# EAGLE board Relay-Board_Rack-PDU_2.0 (EAGLE 9.2.1), part 1 of 2
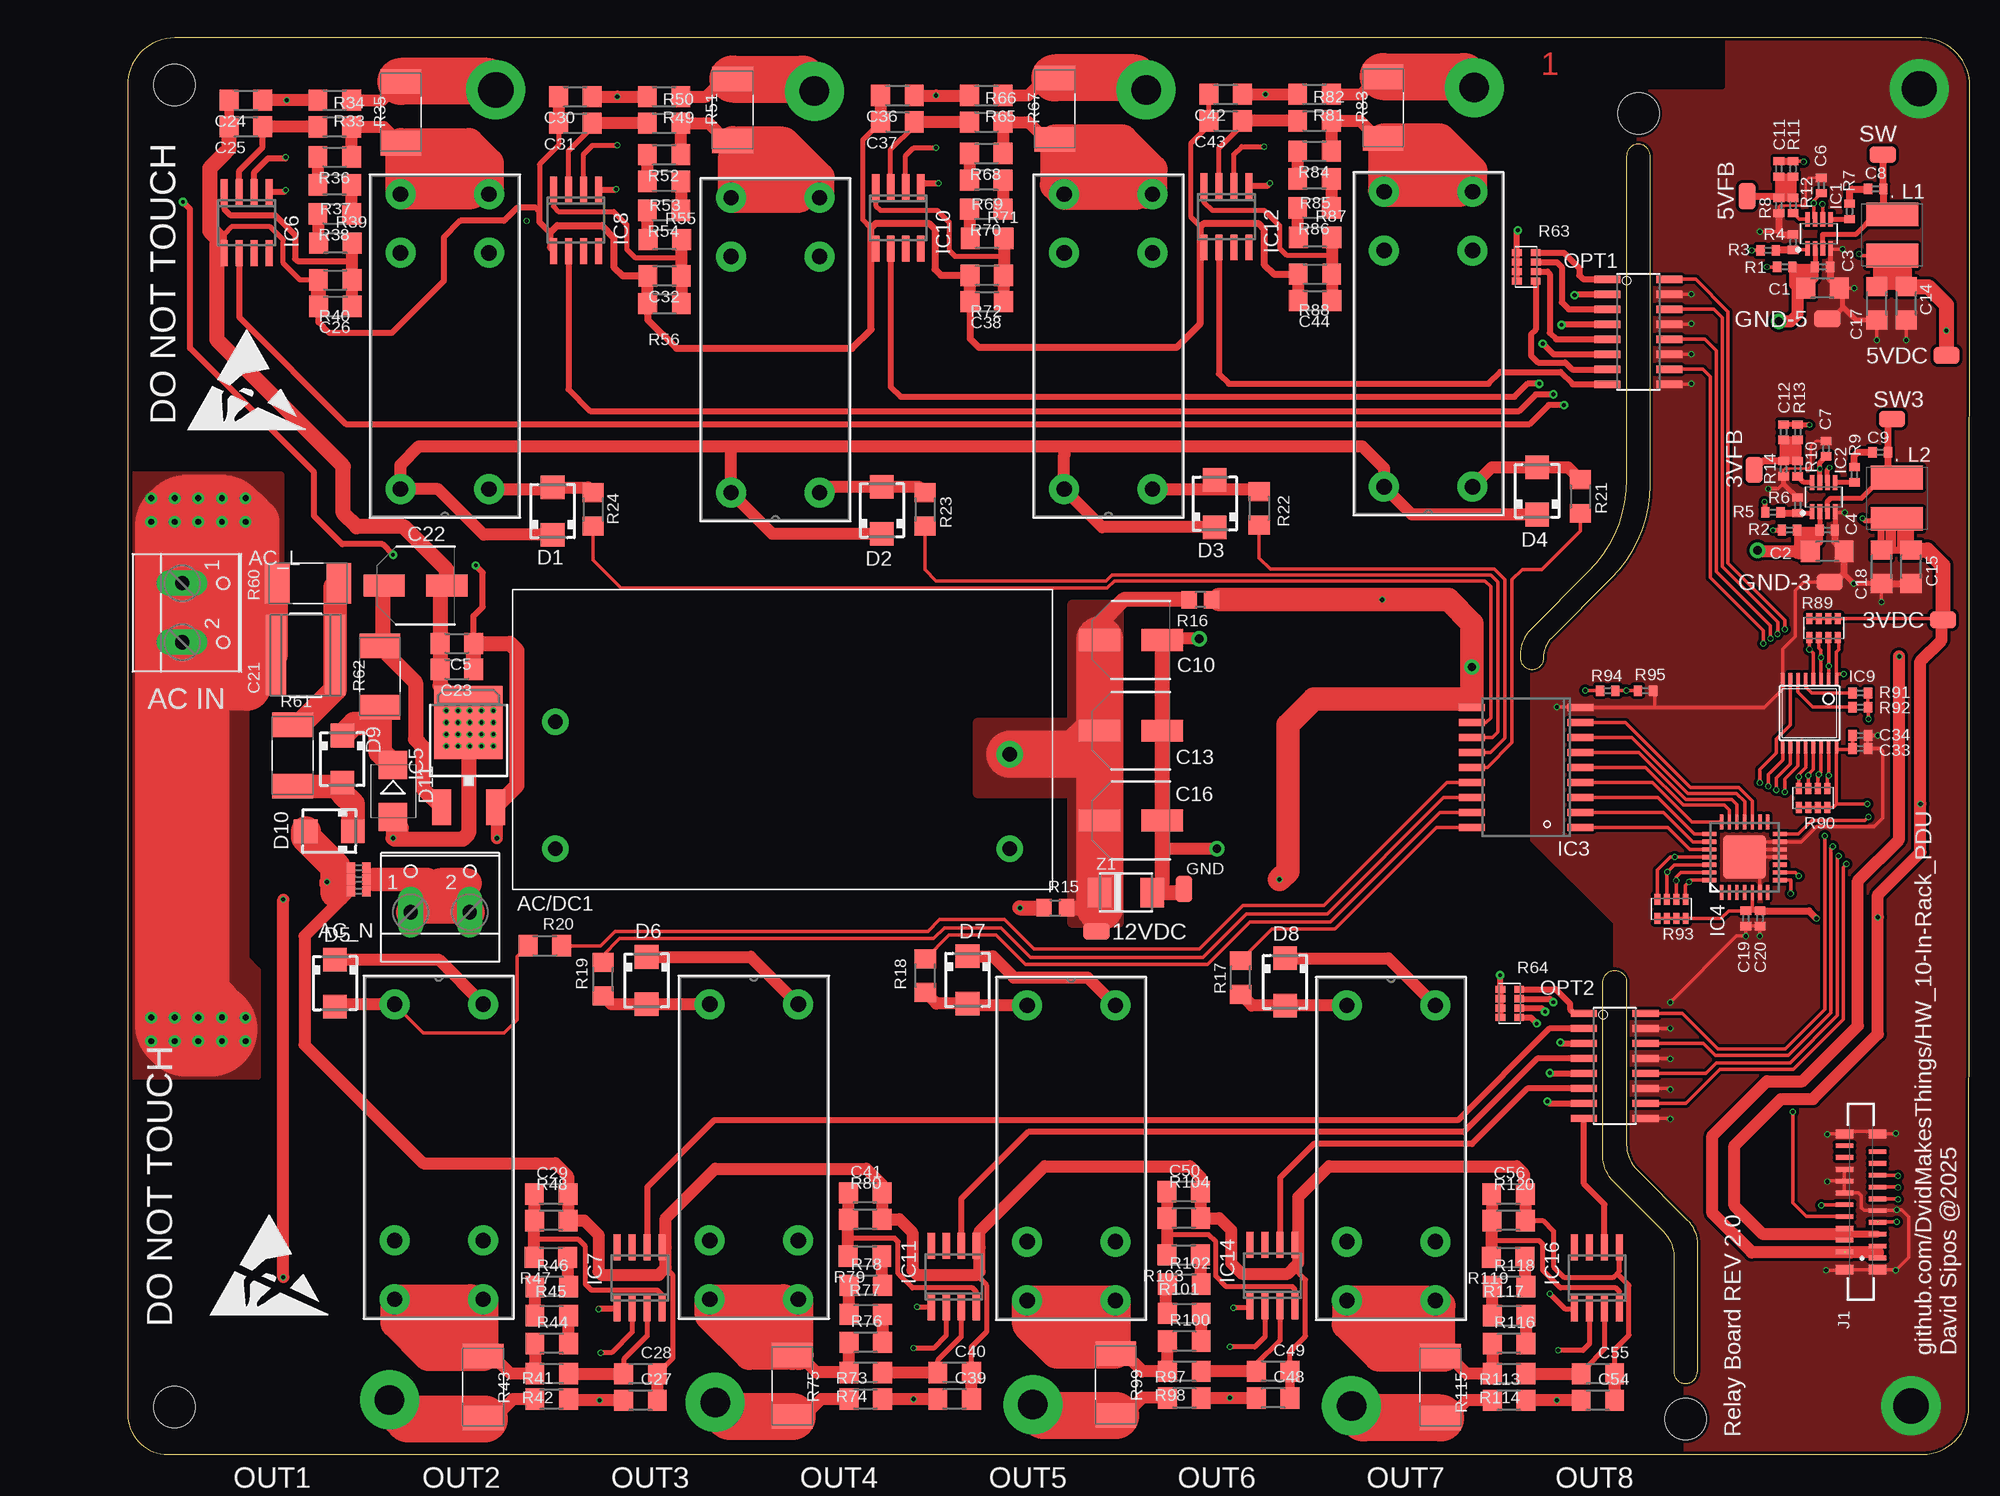
[diagram p0: board, top side]
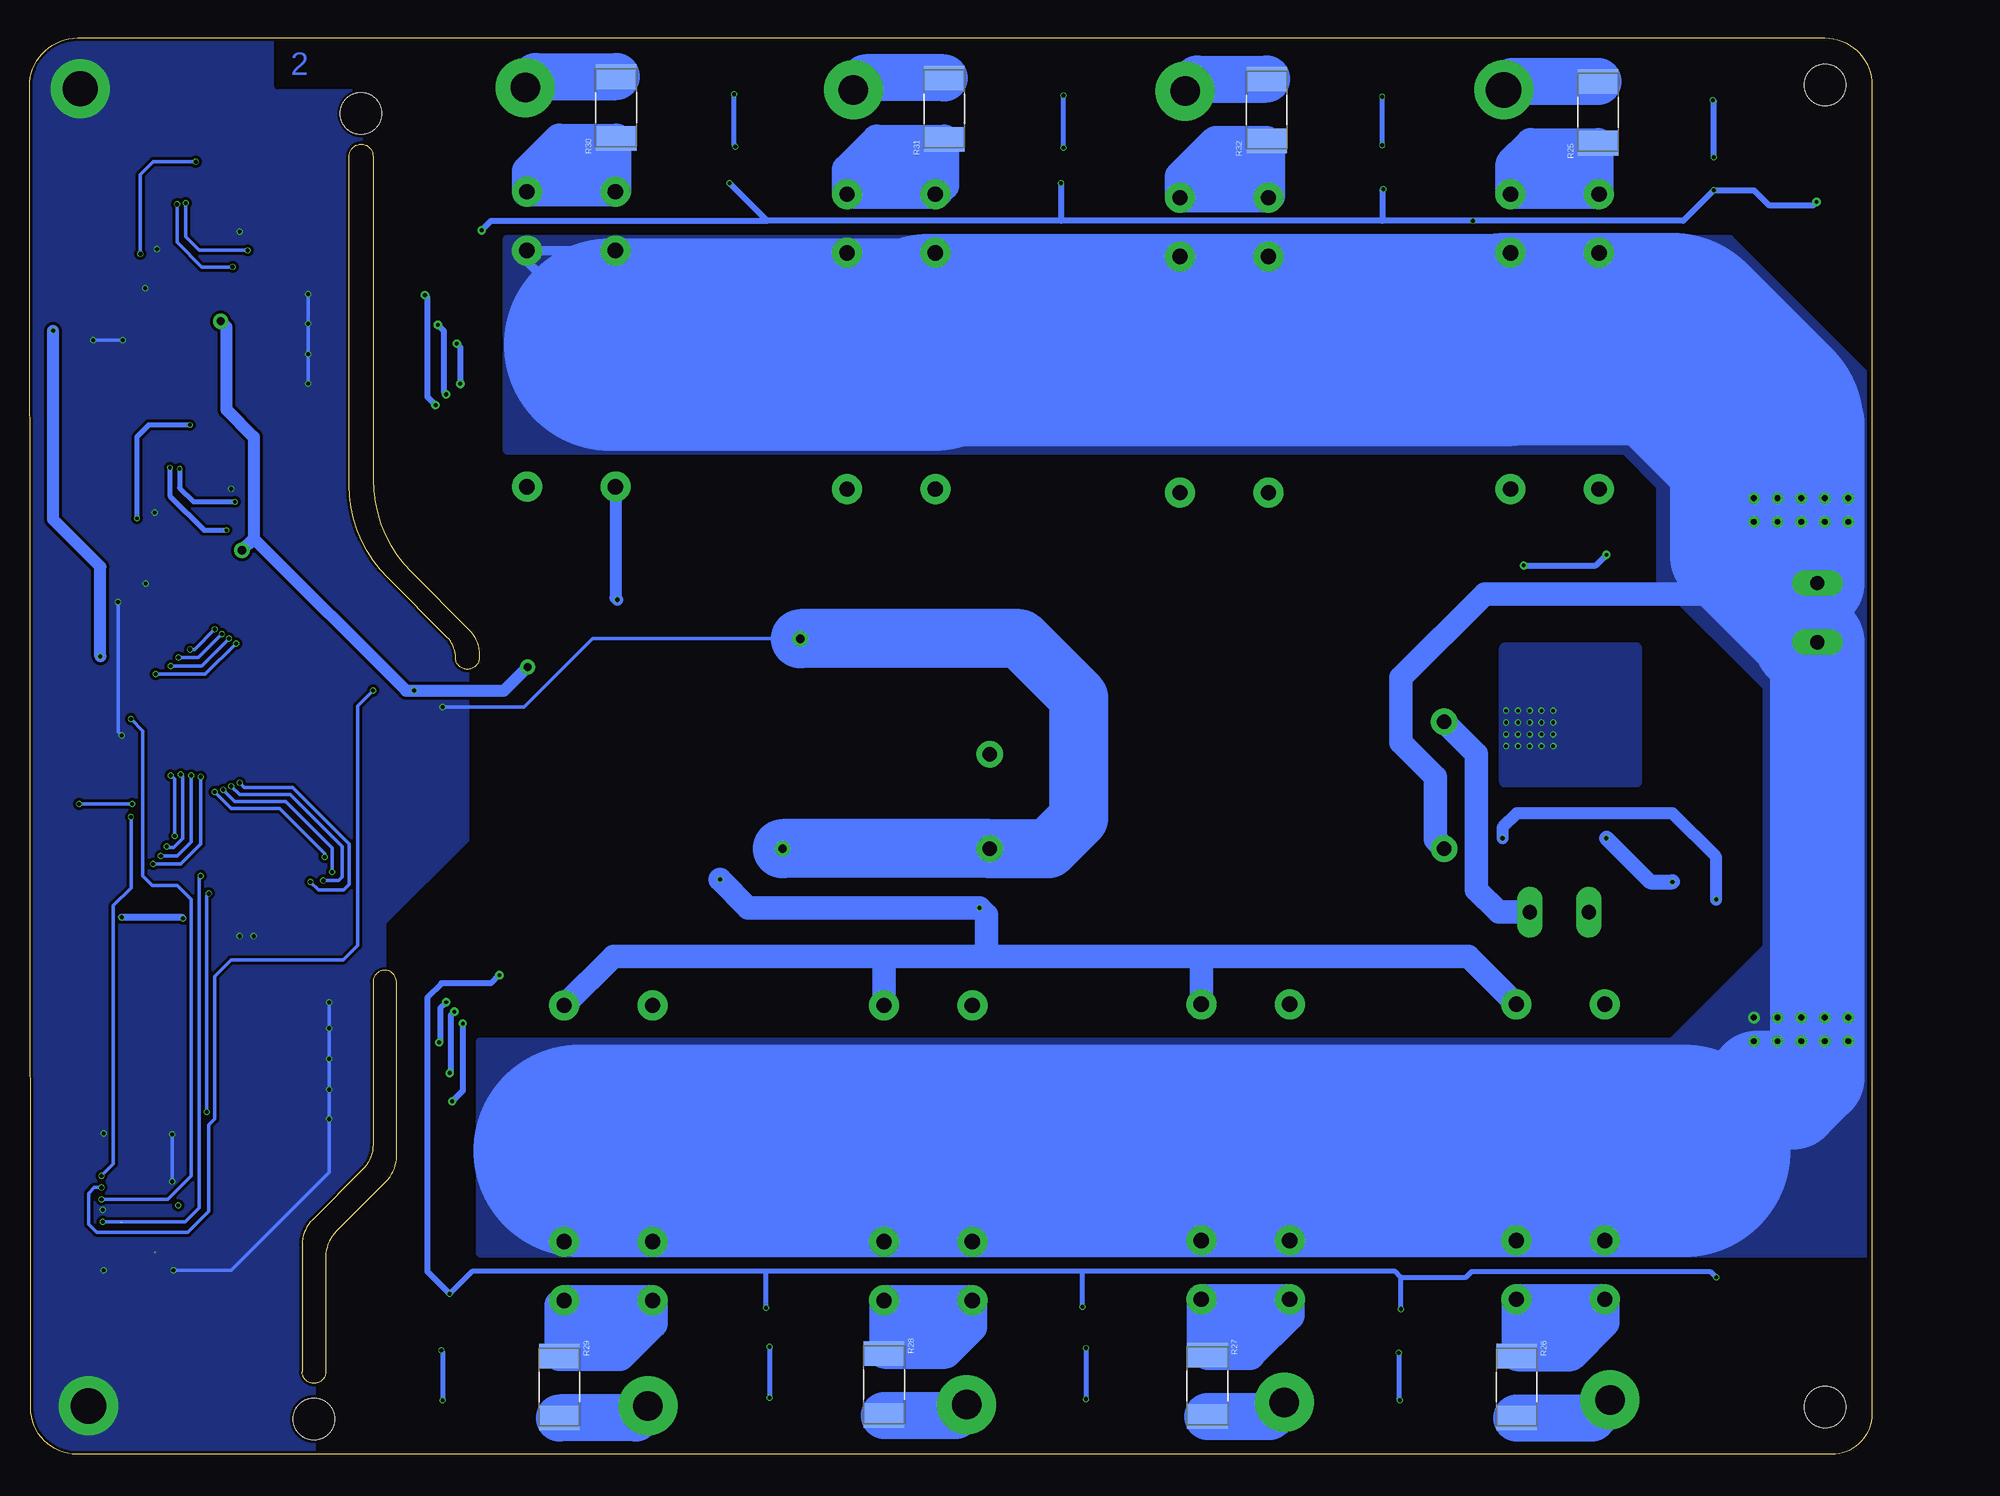
[diagram p1: board, bottom side, seen from below]

Size 156.1 x 120 mm. Coordinates in mm from the lower left corner, seen from the top.
Outline: 3.41,0 152.07,0 arc90 156,3.92 156.1,115.91 arc90 152.01,120 4,120 arc90 0,116 0,3.41 arc90 3.41,0
Outline: 120,67.5 arc-45 120.71,69.21 125.72,74.22 arc45 129,82.14 129,110 arc90 128,111 arc90 127,110 127,82.61 arc-45 123.74,74.74 118.88,69.88 arc45 118,67.76 118,67.5 arc90 119,66.5 arc90 120,67.5
Outline: 125.88,23.12 130.12,18.88 arc-45 131,16.76 131,7 arc90 132,6 arc90 133,7 133,17.76 arc45 132.12,19.88 127.88,24.12 arc-45 127,26.24 127,40 arc90 126,41 arc90 125,40 125,25.24 arc45 125.88,23.12
Copper layers (1*16): Top 0.035mm / dielectric 1.6mm / Bottom 0.035mm
Design rules "jlcpcb-2layers": minimum track width 5mil, minimum drill 0.3mm, track to track 5mil, track to pad 5mil, pad to pad 5mil, via to via 5mil, smd to smd 5mil, copper to edge 0.2mm, drill to drill 6mil, minimum pad ring 10mil, minimum via ring 3mil, stop-mask expansion 4mil, vias tented up to drill 0mil, thermal gap 10mil
Net classes: 0 default: width 0.2 mm, drill 0.3 mm, clearance 0.191 mm
Holes 3.5 mm at 4,116 4,4 132,3 128,113.6

## Footprints (pad centres in the part's own frame; a part is rotated, then mirrored left to right if it is on the bottom)
TP = smd 2.2 x 1.4: TP 0,0
IRM_10_12 = drill 1.24: +V 19.25,0.02; -V 19.25,-7.98; AC_L -19.25,-7.98; AC_N -19.25,2.77
W237-102 = drill 1.194 long: 1 -2.5,-1.27; 2 2.5,-1.27
C1206 = smd 1.6 x 1.803: 1 -1.422,0; 2 1.422,0
0402 = smd 0.7 x 0.9: 1 -0.65,0; 2 0.65,0
100UF-16V = smd 3.5 x 1.85: 1 -2.65,0; 2 2.65,0
C0402 = smd 0.7 x 0.9: 1 -0.65,0; 2 0.65,0
2225 = smd 1.706 x 6.8: 1 -2.503,0; 2 2.503,0
SMA = smd 2 x 2: A 2,0; C -2,0
SMB = smd 2.4 x 2.4: A 2.2,0; C -2.2,0
SOT65P280X110-8N = smd 1.259 x 0.4: 1 -1.228,0.975; 2 -1.228,0.325; 3 -1.228,-0.325; 4 -1.228,-0.975; 5 1.228,-0.975; 6 1.228,-0.325; 7 1.228,0.325; 8 1.228,0.975
SO18 = smd 0.6 x 2.2: 1 -5.08,-4.6; 2 -3.81,-4.6; 3 -2.54,-4.6; 4 -1.27,-4.6; 5 0,-4.6; 6 1.27,-4.6; 7 2.54,-4.6; 8 3.81,-4.6; 9 5.08,-4.6; 10 5.08,4.6; 11 3.81,4.6; 12 2.54,4.6; 13 1.27,4.6; 14 0,4.6; 15 -1.27,4.6; 16 -2.54,4.6; 17 -3.81,4.6; 18 -5.08,4.6
QFN28[6X6]ML = smd 1.27 x 0.35: 1 -2.985,1.95; 2 -2.985,1.3; 3 -2.985,0.65; 4 -2.985,0; 5 -2.985,-0.65; 6 -2.985,-1.3; 7 -2.985,-1.95; 15 2.985,-1.95; 16 2.985,-1.3; 17 2.985,-0.65; 18 2.985,0; 19 2.985,0.65; 20 2.985,1.3; 21 2.985,1.95 | smd 0.35 x 1.27: 8 -1.95,-2.985; 9 -1.3,-2.985; 10 -0.65,-2.985; 11 0,-2.985; 12 0.65,-2.985; 13 1.3,-2.985; 14 1.95,-2.985; 22 1.95,2.985; 23 1.3,2.985; 24 0.65,2.985; 25 0,2.985; 26 -0.65,2.985; 27 -1.3,2.985; 28 -1.95,2.985 | smd 3.7 x 3.7: PAD 0,0
DPAK = smd 1.6 x 3: 1 -2.28,-6.07; 3 2.28,-6.07 | smd 5.8 x 6.2: 4 0,1.11
SO8 = smd 0.6 x 2.2: 1 -1.905,-2.6; 2 -0.635,-2.6; 3 0.635,-2.6; 4 1.905,-2.6; 5 1.905,2.6; 6 0.635,2.6; 7 -0.635,2.6; 8 -1.905,2.6
TSSOP16 = smd 0.305 x 0.991: 1 -2.275,-2.918; 2 -1.625,-2.918; 3 -0.975,-2.918; 4 -0.325,-2.918; 5 0.325,-2.918; 6 0.975,-2.918; 7 1.625,-2.918; 8 2.275,-2.918; 9 2.275,2.918; 10 1.625,2.918; 11 0.975,2.918; 12 0.325,2.918; 13 -0.325,2.918; 14 -0.975,2.918; 15 -1.625,2.918; 16 -2.275,2.918
FPC20 = smd 0.4 x 1.5: 1 -4.552,-1.362; 2 -4.052,1.438; 3 -3.552,-1.362; 4 -3.052,1.438; 5 -2.552,-1.362; 6 -2.052,1.438; 7 -1.552,-1.362; 8 -1.052,1.438; 9 -0.552,-1.362; 10 -0.052,1.438; 11 0.448,-1.362; 12 0.948,1.438; 13 1.448,-1.362; 14 1.948,1.438; 15 2.448,-1.362; 16 2.948,1.438; 17 3.448,-1.362; 18 3.948,1.438; 19 4.448,-1.362; 20 4.948,1.438 | smd 0.8 x 1.5: Z1 -5.552,-1.362; Z2 -5.552,1.438; Z3 5.948,-1.362; Z4 5.948,1.438
RELAY_G2RL-1A-E_DC5_OMR = drill 1.295 pad 2.54: 1 -3.683,12.776; 3 -3.683,-7.239; 4 -3.683,-12.217; 5 3.81,-12.217; 6 3.81,-7.239; 8 3.81,12.776
SRR5228A = smd 4.4 x 2: 1 0,1.75; 2 0,-1.75
SO16 = smd 0.61 x 2.21: 1 -4.445,-2.616; 2 -3.175,-2.616; 3 -1.905,-2.616; 4 -0.635,-2.616; 5 0.635,-2.616; 6 1.905,-2.616; 7 3.175,-2.616; 8 4.445,-2.616; 9 4.445,2.616; 10 3.175,2.616; 11 1.905,2.616; 12 0.635,2.616; 13 -0.635,2.616; 14 -1.905,2.616; 15 -3.175,2.616; 16 -4.445,2.616
0805 = smd 1.3 x 1.5: 1 -0.95,0; 2 0.95,0
1206 = smd 1.6 x 1.803: 1 -1.422,0; 2 1.422,0
2512 = smd 2.08 x 3.44: 1 -2.616,0; 2 2.616,0
742C083103JP = smd 0.59 x 0.92: 1 -1.2,-0.8; 2 -0.4,-0.8; 3 0.4,-0.8; 4 1.2,-0.8; 5 1.2,0.8; 6 0.4,0.8; 7 -0.4,0.8; 8 -1.2,0.8
SUPRESSOR_SMAJ = smd 2 x 2.5: A 2.223,0; C -2.223,0

## Placement (x,y rotation side)
3VDC  TP  [TP]  153.8,70.7 180 top
3VFB  TP  [TP]  137.8,83.4 270 top
5VDC  TP  [TP]  154.1,93.1 180 top
5VFB  TP  [TP]  137.2,106.6 270 top
12VDC  TP  [TP]  82.1,44.3 0 top
AC/DC1  IRM_10_12  [IRM_10_12]  55.5,59.3 0 top
AC_L  [W237-102]  5.9,71.3 270 top
AC_N  [W237-102]  26.5,47.2 0 top
C1  22uF 25V  [C1206]  143.6,98.8 0 top
C2  22uF 25V  [C1206]  144,76.5 0 top
C3  100nF  [0402]  143.6,100.6 0 top
C4  100nF  [0402]  144,78.3 0 top
C5  10uF 16V  [C1206]  27.9,68.7 180 top
C6  100nF  [0402]  143.5,107.5 90 top
C7  100nF  [0402]  143.9,85.2 90 top
C8  100nF  [0402]  148.1,107.2 0 top
C9  100nF  [0402]  148.5,84.9 0 top
C10  100uF  [100UF-16V]  85,69 0 top
C11  33pF  [0402]  139.9,108.9 270 top
C12  33pF  [0402]  140.3,86.6 270 top
C13  100uF  [100UF-16V]  85,61.3 0 top
C14  22uF - 10V  [C1206]  150.7,97.5 270 top
C15  22uF - 10V  [C1206]  151.1,75.2 270 top
C16  100uF  [100UF-16V]  85,53.7 0 top
C17  22uF - 10V  [C1206]  148.2,97.5 270 top
C18  22uF - 10V  [C1206]  148.6,75.2 270 top
C19  100nF  [C0402]  137.1,45.4 270 top
C20  100nF  [C0402]  138.3,45.4 270 top
C21  470nF 630V  [2225]  15.1,67.7 0 top
C22  470uF 25V  [100UF-16V]  24.4,73.6 0 top
C23  10uF 16V  [C1206]  27.9,66.5 180 top
C24  33nF  [C1206]  10.03,114.72 180 top
C25  33nF  [C1206]  10.03,112.48 180 top
C26  33nF  [C1206]  17.6,97.25 180 top
C27  33nF  [C1206]  43.47,4.58 0 top
C28  33nF  [C1206]  43.47,6.82 0 top
C29  33nF  [C1206]  35.9,22.05 0 top
C30  33nF  [C1206]  37.93,115.02 180 top
C31  33nF  [C1206]  37.93,112.78 180 top
C32  33nF  [C1206]  45.5,99.85 180 top
C33  100nF  [C0402]  146.8,59.8 0 top
C34  100nF  [C0402]  146.8,60.9 0 top
C36  33nF  [C1206]  65.23,115.12 180 top
C37  33nF  [C1206]  65.23,112.88 180 top
C38  33nF  [C1206]  72.8,97.65 180 top
C39  33nF  [C1206]  70.07,4.68 0 top
C40  33nF  [C1206]  70.07,6.92 0 top
C41  33nF  [C1206]  62.5,22.15 0 top
C42  33nF  [C1206]  93.03,115.22 180 top
C43  33nF  [C1206]  93.03,112.98 180 top
C44  33nF  [C1206]  100.6,97.75 180 top
C48  33nF  [C1206]  97.07,4.78 0 top
C49  33nF  [C1206]  97.07,7.02 0 top
C50  33nF  [C1206]  89.5,22.25 0 top
C54  33nF  [C1206]  124.57,4.58 0 top
C55  33nF  [C1206]  124.57,6.82 0 top
C56  33nF  [C1206]  117,22.05 0 top
D1  MBRA340T3G  [SMA]  36.02,79.91 90 top
D2  MBRA340T3  [SMA]  63.92,79.98 90 top
D3  MBRA340T3  [SMA]  92.12,80.55 90 top
D4  MBRA340T3  [SMA]  119.42,81.62 90 top
D5  MBRA340T3  [SMA]  17.58,39.91 270 top
D6  MBRA340T3  [SMA]  43.98,40.14 270 top
D7  MBRA340T3  [SMA]  71.17,40.19 270 top
D8  MBRA340T3  [SMA]  98.07,40.02 270 top
D9  S1M  [SMA]  18.2,58.9 270 top
D10  S1M  [SMA]  17.1,52.8 180 top
D11  9.1V 1W  [SMB]  22.5,56.2 270 top
GND  TP  [TP]  89.5,47.9 90 top
GND-3  TP  [TP]  144.2,73.9 180 top
GND-5  TP  [TP]  144,96.2 0 top
IC1  MP2315GJ-Z  [SOT65P280X110-8N]  143.3,103.4 90 top
IC2  MP2315S  [SOT65P280X110-8N]  143.7,81.1 90 top
IC3  ULN2803A  [SO18]  118.5,58.2 90 top
IC4  MCP23017-E/ML  [QFN28[6X6]ML]  137,50.6 90 top
IC5  BA50BC0FP-E2  [DPAK]  28.9,60.9 0 top
IC6  HLW8032  [SO8]  10.1,104.35 180 top
IC7  HLW8032  [SO8]  43.4,14.95 0 top
IC8  HLW8032  [SO8]  38,104.55 180 top
IC9  SN74HC151PWR  [TSSOP16]  142.5,62.8 180 top
IC10  HLW8032  [SO8]  65.3,104.75 180 top
IC11  HLW8032  [SO8]  70,15.05 0 top
IC12  HLW8032  [SO8]  93.1,104.85 180 top
IC14  HLW8032  [SO8]  97,15.15 0 top
IC16  HLW8032  [SO8]  124.5,14.95 0 top
J1  FPC20-H  [FPC20]  146.9,21.2 90 top
K1  G2RL-1A-E_DC12  [RELAY_G2RL-1A-E_DC5_OMR]  26.94,94.55 180 top
K2  G2RL-1A-E_DC12  [RELAY_G2RL-1A-E_DC5_OMR]  54.95,94.25 180 top
K3  G2RL-1A-E_DC12  [RELAY_G2RL-1A-E_DC5_OMR]  83.16,94.55 180 top
K4  G2RL-1A-E_DC12  [RELAY_G2RL-1A-E_DC5_OMR]  110.27,94.75 180 top
K5  G2RL-1A-E_DC12  [RELAY_G2RL-1A-E_DC5_OMR]  26.32,25.35 0 top
K6  G2RL-1A-E_DC12  [RELAY_G2RL-1A-E_DC5_OMR]  53.01,25.35 0 top
K7  G2RL-1A-E_DC12  [RELAY_G2RL-1A-E_DC5_OMR]  79.9,25.25 0 top
K8  G2RL-1A-E_DC12  [RELAY_G2RL-1A-E_DC5_OMR]  106.99,25.25 0 top
L1  4.9uH  [SRR5228A]  149.5,103.3 0 top
L2  4.2uH  [SRR5228A]  149.9,81 0 top
OPT1  TLP291-4  [SO16]  128,95.1 270 top
OPT2  TLP291-4  [SO16]  126,32.9 270 top
R1  499K  [0402]  140.4,100.6 180 top
R2  499K  [0402]  140.8,78.3 180 top
R3  100K  [0402]  139,102 0 top
R4  9.09K  [0402]  141.1,102.7 90 top
R5  100K  [0402]  139.4,79.8 0 top
R6  7.5K  [0402]  141.5,80.4 90 top
R7  10R  [0402]  145.9,105.3 270 top
R8  20K  [0402]  141.1,105.8 90 top
R9  10R  [0402]  146.3,83 270 top
R10  33K  [0402]  141.5,83.5 90 top
R11  40.2K  [0402]  141.1,108.9 270 top
R12  7.5K  [0402]  139.9,105.8 270 top
R13  40.2K  [0402]  141.5,86.6 270 top
R14  12.7K  [0402]  140.3,83.5 270 top
R15  0R  [0805]  78.6,46.3 0 top
R16  0R  [0805]  90.9,72.4 180 top
R17  330R 1W  [1206]  94.3,40.4 270 top
R18  330R 1W  [1206]  67.59,40.55 270 top
R19  330R 1W  [1206]  40.3,40.25 270 top
R20  330R 1W  [1206]  35.35,43.09 180 top
R21  330R 1W  [1206]  123.08,81.15 90 top
R22  330R 1W  [1206]  95.87,80.15 90 top
R23  330R 1W  [1206]  67.56,80.05 90 top
R24  330R 1W  [1206]  39.45,80.05 90 top
R25  0.002R 1%  [2512]  23.2,113.7 90 bottom
R26  0.002R 1%  [2512]  30.1,5.7 270 bottom
R27  0.002R 1%  [2512]  56.3,5.8 270 bottom
R28  0.002R 1%  [2512]  83.7,5.9 270 bottom
R29  0.002R 1%  [2512]  111.2,5.7 270 bottom
R30  0.002R 1%  [2512]  106.4,114.1 90 bottom
R31  0.002R 1%  [2512]  78.6,114 90 bottom
R32  0.002R 1%  [2512]  51.3,113.9 90 bottom
R33  1K 1%  [1206]  17.56,114.73 180 top
R34  1K 1%  [1206]  17.56,112.47 180 top
R35  0.002R 1%  [2512]  23.17,113.7 90 top
R36  470K  [1206]  17.56,109.91 180 top
R37  470K  [1206]  17.56,107.55 0 top
R38  470K  [1206]  17.56,105.09 180 top
R39  470K  [1206]  17.62,102.61 0 top
R40  1K 1%  [1206]  17.6,99.49 180 top
R41  1K 1%  [1206]  35.94,4.67 0 top
R42  1K 1%  [1206]  35.94,6.83 0 top
R43  0.002R 1%  [2512]  30.13,5.7 270 top
R44  470K  [1206]  35.94,9.39 0 top
R45  470K  [1206]  35.94,11.75 180 top
R46  470K  [1206]  35.94,14.21 0 top
R47  470K  [1206]  35.88,16.69 180 top
R48  1K 1%  [1206]  35.9,19.81 0 top
R49  1K 1%  [1206]  45.46,115.03 180 top
R50  1K 1%  [1206]  45.46,112.77 180 top
R51  0.002R 1%  [2512]  51.27,113.9 90 top
R52  470K  [1206]  45.46,110.11 180 top
R53  470K  [1206]  45.46,107.85 0 top
R54  470K  [1206]  45.46,105.39 180 top
R55  470K  [1206]  45.52,102.91 0 top
R56  1K 1%  [1206]  45.5,97.49 180 top
R57  JP  [0402]  19.6,48.7 180 top
R58  JP  [0402]  19.6,49.7 180 top
R59  JP  [0402]  19.6,47.7 180 top
R60  470K 1W  [2512]  15.3,73.8 0 top
R61  100R 1W  [2512]  14,59.2 270 top
R62  100R 1W  [2512]  21.4,65.9 90 top
R63  4x1K 1206  [742C083103JP]  118.5,100.6 270 top
R64  4x1K 1206  [742C083103JP]  117.1,38.2 270 top
R65  1K 1%  [1206]  72.76,115.13 180 top
R66  1K 1%  [1206]  72.76,112.87 180 top
R67  0.002R 1%  [2512]  78.57,114 90 top
R68  470K  [1206]  72.76,110.21 180 top
R69  470K  [1206]  72.76,107.95 0 top
R70  470K  [1206]  72.76,105.49 180 top
R71  470K  [1206]  72.82,103.01 0 top
R72  1K 1%  [1206]  72.8,99.89 180 top
R73  1K 1%  [1206]  62.54,4.67 0 top
R74  1K 1%  [1206]  62.54,6.93 0 top
R75  0.002R 1%  [2512]  56.33,5.8 270 top
R76  470K  [1206]  62.54,9.49 0 top
R77  470K  [1206]  62.54,11.85 180 top
R78  470K  [1206]  62.54,14.31 0 top
R79  470K  [1206]  62.48,16.79 180 top
R80  1K 1%  [1206]  62.5,19.91 0 top
R81  1K 1%  [1206]  100.56,115.23 180 top
R82  1K 1%  [1206]  100.56,112.97 180 top
R83  0.002R 1%  [2512]  106.37,114.1 90 top
R84  470K  [1206]  100.56,110.41 180 top
R85  470K  [1206]  100.56,108.05 0 top
R86  470K  [1206]  100.56,105.59 180 top
R87  470K  [1206]  100.62,103.11 0 top
R88  1K 1%  [1206]  100.6,99.99 180 top
R89  4x1K 1206  [742C083103JP]  143.7,70 0 top
R90  4x1K 1206  [742C083103JP]  142.8,55.6 180 top
R91  0R  [0402]  146.8,64.5 0 top
R92  0R  [0402]  146.8,63.3 0 top
R93  4x10K 1206  [742C083103JP]  130.8,46.2 180 top
R94  100K  [0402]  125.4,64.7 180 top
R95  10K  [0402]  128.6,64.7 180 top
R97  1K 1%  [1206]  89.54,4.77 0 top
R98  1K 1%  [1206]  89.54,7.03 0 top
R99  0.002R 1%  [2512]  83.73,5.9 270 top
R100  470K  [1206]  89.54,9.59 0 top
R101  470K  [1206]  89.54,11.95 180 top
R102  470K  [1206]  89.54,14.41 0 top
R103  470K  [1206]  89.48,16.89 180 top
R104  1K 1%  [1206]  89.5,20.01 0 top
R113  1K 1%  [1206]  117.04,4.57 0 top
R114  1K 1%  [1206]  117.04,6.83 0 top
R115  0.002R 1%  [2512]  111.23,5.7 270 top
R116  470K  [1206]  117.04,9.39 0 top
R117  470K  [1206]  117.04,11.75 180 top
R118  470K  [1206]  117.04,14.21 0 top
R119  470K  [1206]  116.98,16.69 180 top
R120  1K 1%  [1206]  117,19.81 0 top
SW  TP  [TP]  148.7,110.1 180 top
SW3  TP  [TP]  149.5,87.7 180 top
U$1  [ESD_10.00]  6.9,11.7 0 top
U$2  [ESD_10.00]  5,86.7 0 top
U$3  [2-LAYER]  118.6,115.9 0 top
Z1  SMAJ15A  [SUPRESSOR_SMAJ]  84.6,47.6 0 top

## Library data of the parts
3VDC 3VFB 5VDC 5VFB 12VDC C1-C34 C36-C44 C48-C50 C54-C56 GND GND-3 GND-5 L1 L2 R1-R62 R65-R88 R91 R92 R94 R95 R97-R104 R113-R120 SW SW3 U$3 = ds_passive
AC/DC1 = ds_trafo
AC_L AC_N = con-wago-500; MPN: 237-102; OC_FARNELL: unknown; OC_NEWARK: 70K9898
D1-D11 = diode
IC1 IC2 IC5 = ds_ic_vreg
IC3 IC4 IC6-IC8 IC10-IC12 IC14 IC16 OPT1 OPT2 = ds_ic_peripherals
IC9 = ds_ic_logic
J1 = ds_con
K1-K8 = ds_passive; COPYRIGHT: Copyright (C) 2025 Ultra Librarian. All rights reserved.; MANUFACTURER_PART_NUMBER: G2RL-1A-E DC12; MFR_NAME: Omron
R63 R64 R89 R90 R93 = Resistor Array; CREATED_BY: PCBLayout.com; DIGIKEY_PN: 742C083103JPTR-ND; MANUFACTURER: CTS Resistor Products; MPN: 742C083103JP; PACKAGE: 1206
U$1 U$2 = logo
Z1 = 52101-101-REV-A_v16

## Nets
5VFB: 5VFB.TP C11.2 R8.2 R11.2 R12.1
+3V3: 3VDC.TP C12.1 C15.1 C18.1 C19.1 C20.1 C33.1 C34.1 IC4.5 IC9.16 J1.4 J1.5 J1.6 L2.2 R13.1 R89.5 R89.6 R89.7 R89.8 R90.5 R90.6 R90.7 R90.8 R93.5 R93.6 R93.7 R93.8
+5V: 5VDC.TP C11.1 C14.1 C17.1 J1.1 J1.2 J1.3 L1.2 R11.1
+5V_MEA: C5.1 C23.1 IC5.3 IC6.1 IC7.1 IC8.1 IC10.1 IC11.1 IC12.1 IC14.1 IC16.1 R63.1 R63.2 R63.3 R63.4 R64.1 R64.2 R64.3 R64.4
+12V: C1.1 C2.1 C3.1 C4.1 D1.C D2.C D3.C D4.C D5.C D6.C D7.C D8.C IC1.2 IC2.2 IC3.10 K1.8 K2.8 K3.8 K4.8 K5.8 K6.8 K7.8 K8.8 R1.1 R2.1 R15.1 R16.1 R94.2
+12V_MEA: J1.13 R94.1 R95.2
AC_L: AC/DC1.AC_L AC_L.1 AC_L.2 C21.1 K1.3 K1.6 K2.3 K2.6 K3.3 K3.6 K4.3 K4.6 K5.3 K5.6 K6.3 K6.6 K7.3 K7.6 K8.3 K8.6 R60.1
AC_N: AC/DC1.AC_N AC_N.1 AC_N.2 R57.1 R58.1 R59.1
AGND: C5.2 C22.2 C23.2 C24.2 C25.2 C26.2 C27.2 C28.2 C29.2 C30.2 C31.2 C32.2 C36.2 C37.2 C38.2 C39.2 C40.2 C41.2 C42.2 C43.2 C44.2 C48.2 C49.2 C50.2 C54.2 C55.2 C56.2 D10.A D11.A IC5.4 IC6.5 IC7.5 IC8.5 IC10.5 IC11.5 IC12.5 IC14.5 IC16.5 R40.2 R48.2 R56.2 R57.2 R58.2 R59.2 R72.2 R80.2 R88.2 R104.2 R120.2
C13_IN1: R25.2 R33.1 R35.2
C13_IN2: R32.2 R49.1 R51.2
C13_IN3: R31.2 R65.1 R67.2
C13_IN4: R30.2 R81.1 R83.2
C13_IN5: R26.2 R41.1 R43.2
C13_IN6: R27.2 R73.1 R75.2
C13_IN7: R28.2 R97.1 R99.2
C13_IN8: R29.2 R113.1 R115.2
GND: AC/DC1.-V C1.2 C2.2 C3.2 C4.2 C6.2 C7.2 C10.2 C13.2 C14.2 C15.2 C16.2 C17.2 C18.2 C19.2 C20.2 C33.2 C34.2 GND-3.TP GND-5.TP GND.TP IC1.4 IC2.4 IC3.9 IC4.6 IC4.11 IC4.12 IC4.13 IC4.PAD IC9.8 J1.9 J1.12 J1.14 J1.16 J1.Z1 J1.Z2 J1.Z3 J1.Z4 OPT1.9 OPT1.11 OPT1.13 OPT1.15 OPT2.9 OPT2.11 OPT2.13 OPT2.15 R4.2 R6.2 R12.2 R14.2 R95.1 Z1.A
I2C_SCL: IC4.8 J1.8
I2C_SDA: IC4.9 J1.7
MCP_REL_RST: IC4.14 J1.15
MUX_A: IC4.25 IC9.11 R93.4
MUX_B: IC4.26 IC9.10 R93.3
MUX_C: IC4.27 IC9.9 R93.2
MUX_EN: IC4.28 IC9.7 R93.1
N$1: IC9.5 R91.1
N$2: 12VDC.TP AC/DC1.+V C10.1 C13.1 C16.1 R15.2 R16.2 Z1.C
N$3: C21.2 R60.2 R61.1
N$4: IC3.14 R21.1
N$5: OPT1.1 R63.8
N$6: IC3.11 R24.1
N$7: IC3.12 R23.1
N$8: IC3.13 R22.1
N$9: OPT1.3 R63.7
N$10: IC3.15 R20.1
N$11: IC3.16 R19.1
N$12: C24.1 IC6.2 R33.2
N$13: IC3.17 R18.1
N$14: IC1.5 R7.2
N$15: IC3.18 R17.1
N$16: IC1.8 R8.1
N$17: OPT1.5 R63.6
N$18: C8.1 R7.1
N$19: IC1.6 R1.2
N$20: D9.A D10.C R61.2
N$21: C6.1 IC1.7 R3.1
N$22: C25.1 IC6.3 R34.2
N$23: OPT1.7 R63.5
N$24: IC9.6 R92.1
N$25: C22.1 IC5.1 R62.2
N$26: D9.C D11.C R62.1
N$27: R36.2 R37.1
N$28: R37.2 R38.1
N$29: R38.2 R39.1
N$30: C26.1 IC6.4 R39.2 R40.1
N$31: C27.1 IC7.2 R41.2
N$32: C28.1 IC7.3 R42.2
N$33: R44.2 R45.1
N$34: R45.2 R46.1
N$35: R46.2 R47.1
N$36: C29.1 IC7.4 R47.2 R48.1
N$37: OPT2.1 R64.8
N$38: IC2.5 R9.2
N$39: IC2.8 R10.1
N$40: OPT2.3 R64.7
N$41: C9.1 R9.1
N$42: 3VFB.TP C12.2 R10.2 R13.2 R14.1
N$43: IC2.6 R2.2
N$44: C7.1 IC2.7 R5.1
N$45: IC1.1 R3.2 R4.1
N$46: IC2.1 R5.2 R6.1
N$47: C30.1 IC8.2 R49.2
N$48: C31.1 IC8.3 R50.2
N$49: R52.2 R53.1
N$50: R53.2 R54.1
N$51: R54.2 R55.1
N$52: C32.1 IC8.4 R55.2 R56.1
N$53: OPT2.5 R64.6
N$54: OPT2.7 R64.5
N$59: C36.1 IC10.2 R65.2
N$60: C37.1 IC10.3 R66.2
N$61: R68.2 R69.1
N$62: R69.2 R70.1
N$63: R70.2 R71.1
N$64: C38.1 IC10.4 R71.2 R72.1
N$65: C39.1 IC11.2 R73.2
N$66: C40.1 IC11.3 R74.2
N$67: R76.2 R77.1
N$68: R77.2 R78.1
N$69: R78.2 R79.1
N$70: C41.1 IC11.4 R79.2 R80.1
N$71: C42.1 IC12.2 R81.2
N$72: C43.1 IC12.3 R82.2
N$73: R84.2 R85.1
N$74: R85.2 R86.1
N$75: R86.2 R87.1
N$76: C44.1 IC12.4 R87.2 R88.1
N$83: C48.1 IC14.2 R97.2
N$84: C49.1 IC14.3 R98.2
N$85: R100.2 R101.1
N$86: R101.2 R102.1
N$87: R102.2 R103.1
N$88: C50.1 IC14.4 R103.2 R104.1
N$95: C54.1 IC16.2 R113.2
N$96: C55.1 IC16.3 R114.2
N$97: R116.2 R117.1
N$98: R117.2 R118.1
N$99: R118.2 R119.1
N$100: C56.1 IC16.4 R119.2 R120.1
OUT_1: K1.4 K1.5 R25.1 R34.1 R35.1 R36.1
OUT_2: K2.4 K2.5 R32.1 R50.1 R51.1 R52.1
OUT_3: K3.4 K3.5 R31.1 R66.1 R67.1 R68.1
OUT_4: K4.4 K4.5 R30.1 R82.1 R83.1 R84.1
OUT_5: K5.4 K5.5 R26.1 R42.1 R43.1 R44.1
OUT_6: K6.4 K6.5 R27.1 R74.1 R75.1 R76.1
OUT_7: K7.4 K7.5 R28.1 R98.1 R99.1 R100.1
OUT_8: K8.4 K8.5 R29.1 R114.1 R115.1 R116.1
REL_0: IC3.8 IC4.17
REL_1: IC3.7 IC4.18
REL_2: IC3.6 IC4.19
REL_3: IC3.5 IC4.20
REL_4: IC3.4 IC4.21
REL_5: IC3.3 IC4.22
REL_6: IC3.2 IC4.23
REL_7: IC3.1 IC4.24
RELAY_1: D1.A K1.1 R24.2
RELAY_2: D2.A K2.1 R23.2
RELAY_3: D3.A K3.1 R22.2
RELAY_4: D4.A K4.1 R21.2
RELAY_5: D5.A K5.1 R20.2
RELAY_6: D6.A K6.1 R19.2
RELAY_7: D7.A K7.1 R18.2
RELAY_8: D8.A K8.1 R17.2
RX_CH1: IC6.8
RX_CH2: IC8.8
RX_CH3: IC10.8
RX_CH4: IC12.8
RX_CH5: IC7.8
RX_CH6: IC11.8
RX_CH7: IC14.8
RX_CH8: IC16.8
SW3: C9.2 IC2.3 L2.1 SW3.TP
SW5: C8.2 IC1.3 L1.1 SW.TP
TX_CH1: IC6.6 OPT1.2
TX_CH2: IC8.6 OPT1.4
TX_CH3: IC10.6 OPT1.6
TX_CH4: IC12.6 OPT1.8
TX_CH5: IC7.6 OPT2.2
TX_CH6: IC11.6 OPT2.4
TX_CH7: IC14.6 OPT2.6
TX_CH8: IC16.6 OPT2.8
TX_MUX1: IC9.4 OPT1.16 R89.1
TX_MUX2: IC9.3 OPT1.14 R89.2
TX_MUX3: IC9.2 OPT1.12 R89.3
TX_MUX4: IC9.1 OPT1.10 R89.4
TX_MUX5: IC9.15 OPT2.16 R90.1
TX_MUX6: IC9.14 OPT2.14 R90.2
TX_MUX7: IC9.13 OPT2.12 R90.3
TX_MUX8: IC9.12 OPT2.10 R90.4
UART0_RX: J1.10
UART0_TX: J1.11 R91.2 R92.2